# Altium PCB RF19_Sensor_CAN_Module.PcbDoc
Units mil, origin at the board's own origin, x right, y up, seen from the top; angles counter-clockwise.
Board outline 2220 x 660 mil, 4 copper layers (Top Layer, Ground Plane, Power Plane, Bottom Layer), stack 64.6 mil thick; 64 components, 48 nets, 194 pads, 72 vias.
Unrouted connection lines stored in the file: 9.
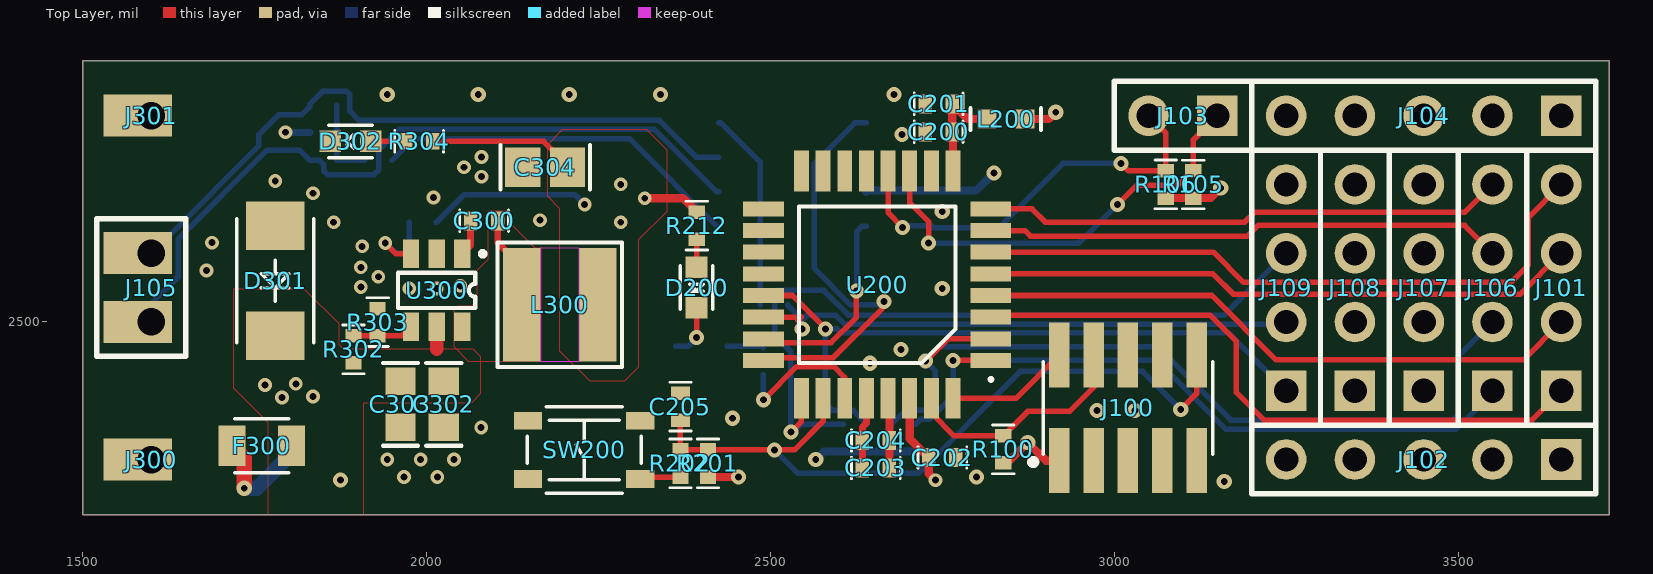
[diagram p0: Top Layer view]
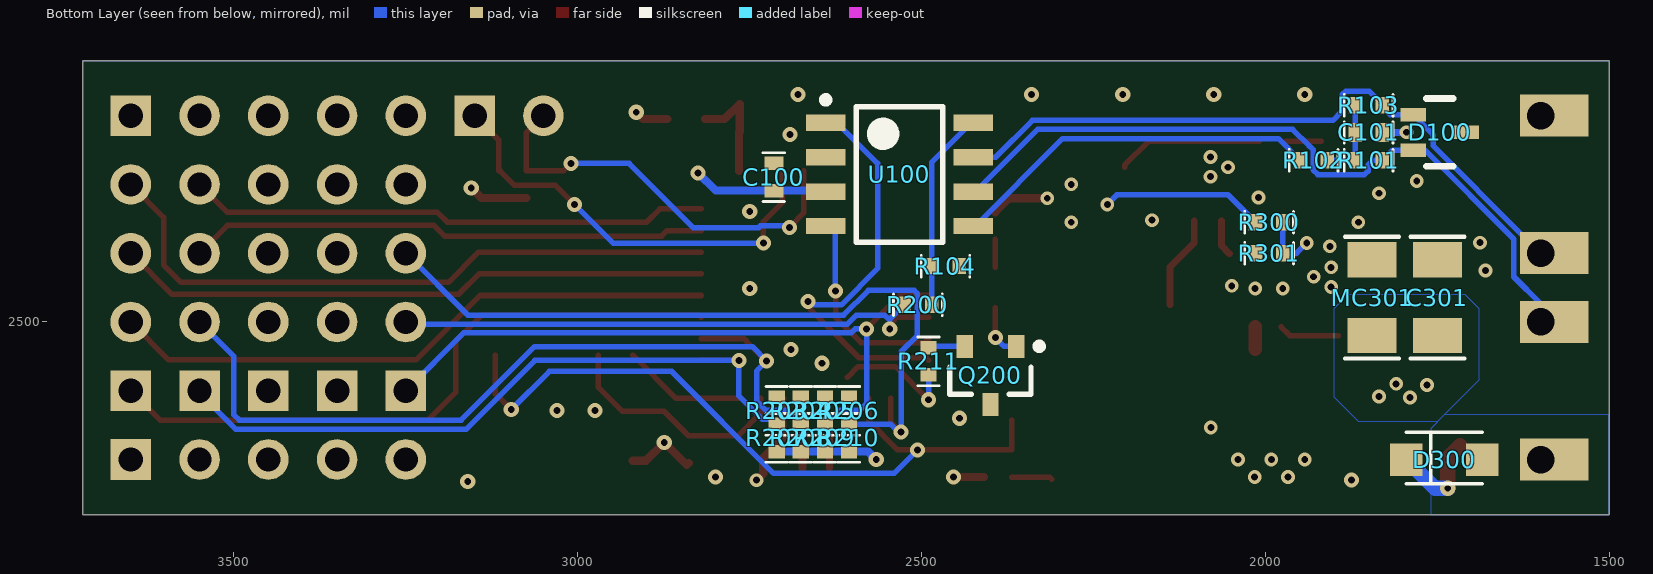
[diagram p1: Bottom Layer view, seen from below]
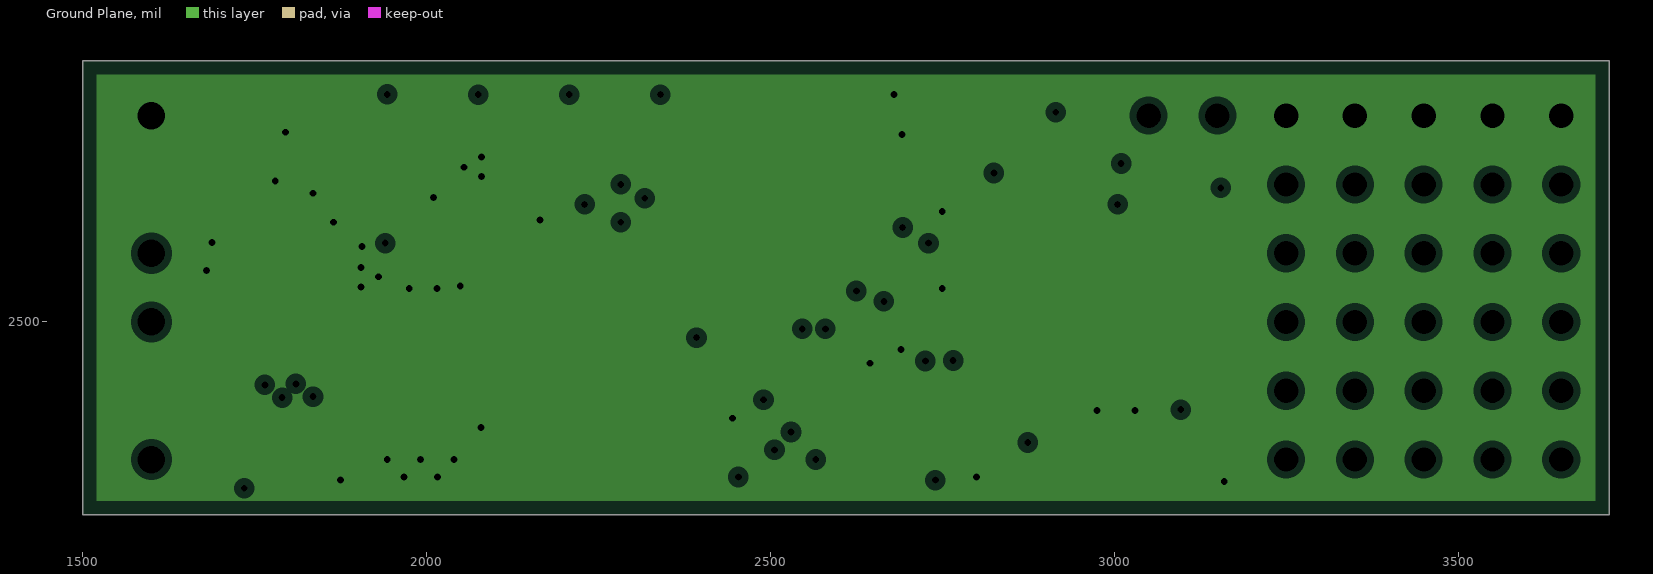
[diagram p2: Ground Plane, clearances drawn from the general rule]
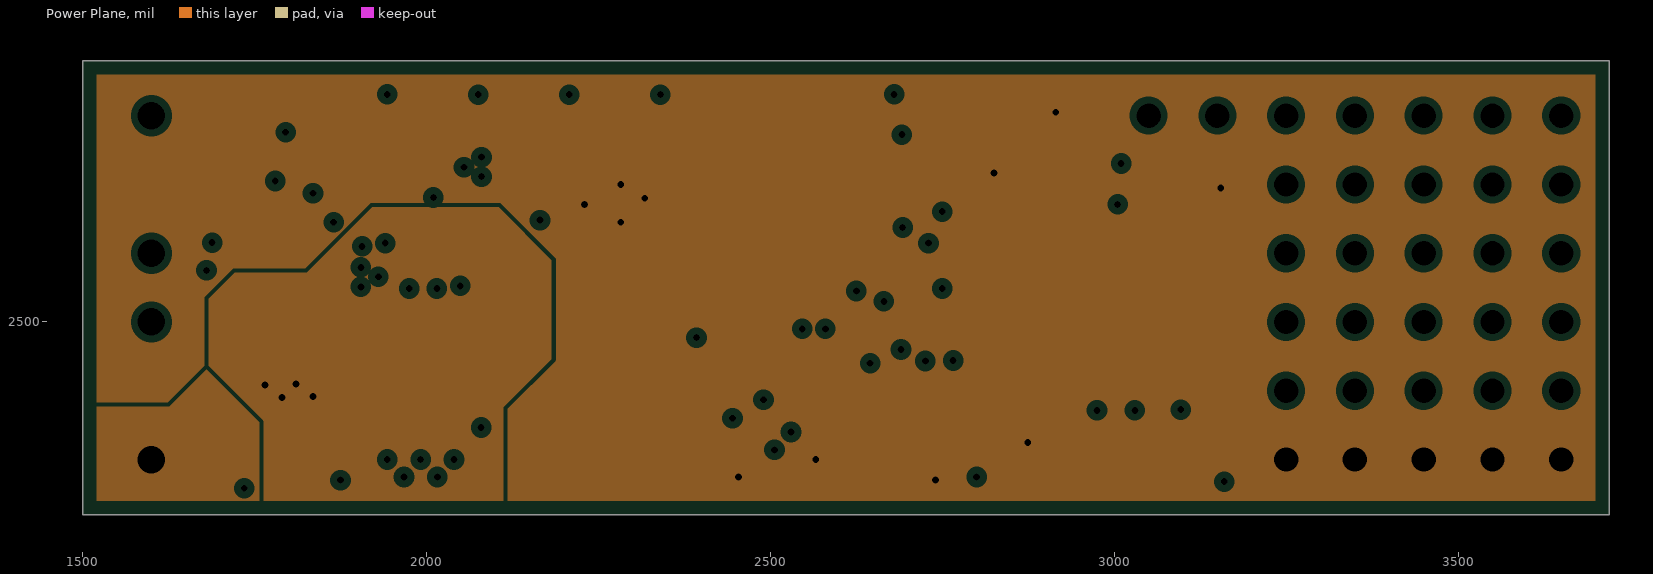
[diagram p3: Power Plane, clearances drawn from the general rule]
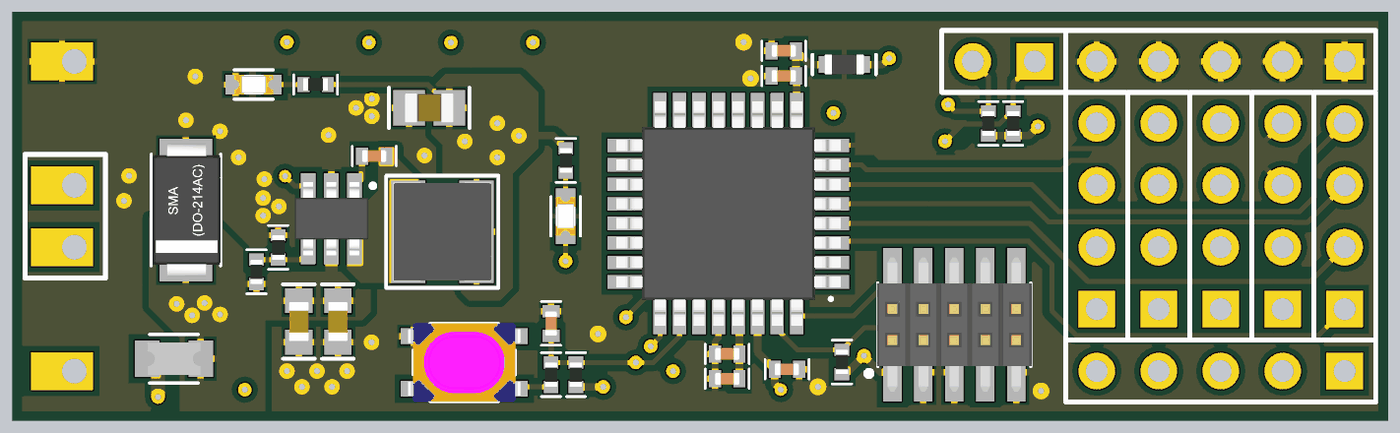
[diagram p4: 3D render of the assembled board from above, using the file's embedded part models]
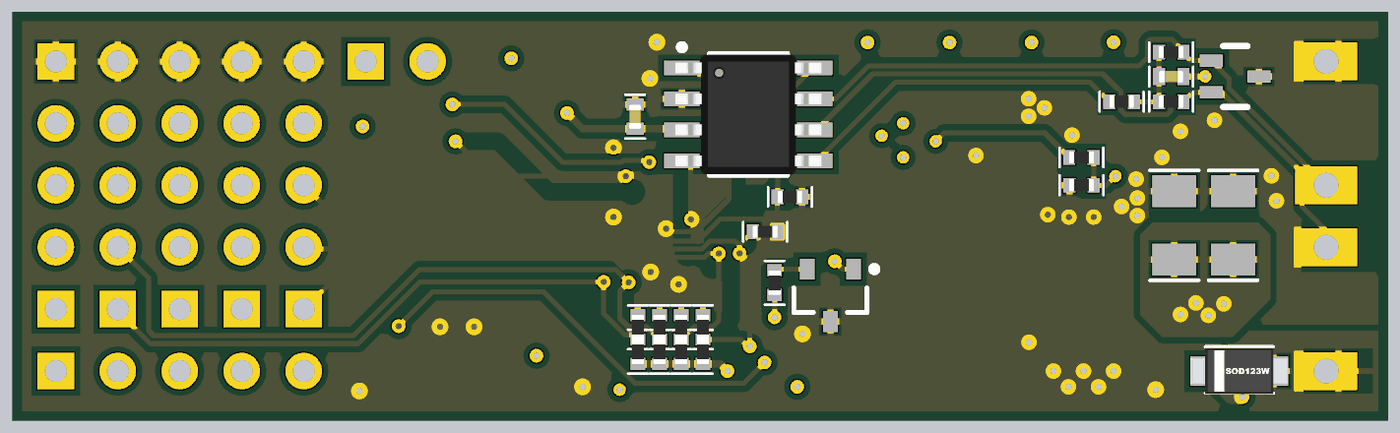
[diagram p5: 3D render of the assembled board from below, using the file's embedded part models]

## Layer stack, top to bottom
Top Solder: solder mask 1, Solder Resist, Dk 3.5
Top Layer: signal copper 1.4
Dielectric 1: prepreg 6.7, FR408, Dk 3.67
Ground Plane: plane copper 0.7, net GND
Dielectric 3: core 47, FR408, Dk 3.67
Power Plane: plane copper 0.7, net +5V
Dielectric 4: prepreg 6.7, FR408, Dk 3.67
Bottom Layer: signal copper 1.4
Bottom Solder: solder mask 1, Solder Resist, Dk 3.5

## Board outline
1500,2220 3720,2220 3720,2880 1500,2880

## Design rules (kind name [scope] priority, off if disabled: settings)
BoardOutlineClearance [All] p1: gap=15 ignorepadtopadclearanceinfootprint=FALSE
Clearance "Clearance Polygons" [InPolygon] p1: gap=10 ignorepadtopadclearanceinfootprint=FALSE except(0: Arc-Hole Track-Hole SMDPad-Hole THPad-Hole Via-Hole Fill-Hole Poly-Hole Region-Hole Text-Hole)
Clearance [All] p2: gap=5 ignorepadtopadclearanceinfootprint=FALSE except(0: Arc-Hole Track-Hole SMDPad-Hole THPad-Hole Via-Hole Fill-Hole Poly-Hole Region-Hole Text-Hole)
ComponentClearance "HM-TRP & UFL" [InComponent('X1') vs InComponent('U1')] p1: gap=0 collisioncheckmode=3 verticalgap=0 showdistances=FALSE
ComponentClearance [All] p2: gap=1 collisioncheckmode=3 verticalgap=1 showdistances=FALSE
DiffPairsRouting [All] p1: maxlimit=393.7 minlimit=5 mostfreqgap=8 toplayer_minwidth=5 toplayer_maxwidth=15 toplayer_prefwidth=8 bottomlayer_minwidth=5 bottomlayer_maxwidth=15 bottomlayer_prefwidth=8 maxuncoupledlength=500
HoleSize [All] p1: absolutevalues=TRUE maxlimit=265 minlimit=10 maxpercent=80.000 minpercent=20.000
HoleToHoleClearance [All] p1: gap=10 allowstackedmicrovias=FALSE
MinimumAnnularRing [All] p1: minimumring=4
MinimumSolderMaskSliver [All] p1: minsoldermaskwidth=0
PlaneClearance [All] p1: clearance=10
PlaneConnect [All] p1: planeconnectstyle=Relief reliefexpansion=4 reliefentries=4 reliefconductorwidth=6 reliefairgap=6
PolygonConnect "SW Polygon Connect" [InNet('SW')] p1: thpad.connectstyle=Relief thpad.reliefconductorwidth=10 thpad.reliefentries=4 thpad.polygonreliefangle="90 Angle" thpad.airgapwidth=10 smdpad.connectstyle=Direct smdpad.reliefconductorwidth=10 smdpad.reliefentries=4 smdpad.polygonreliefangle="90 Angle" smdpad.airgapwidth=10 via.connectstyle=Relief via.reliefconductorwidth=10 via.reliefentries=4 via.polygonreliefangle="45 Angle" via.airgapwidth=10
PolygonConnect "Via connect style" [isVia] p2: connectstyle=Direct reliefconductorwidth=10 reliefentries=4 polygonreliefangle="90 Angle" airgapwidth=10
PolygonConnect [All] p3: connectstyle=Relief reliefconductorwidth=10 reliefentries=4 polygonreliefangle="90 Angle" airgapwidth=6
RoomDefinition RF19_Sensor_CAN_Module_Power [InComponentClass('RF19_Sensor_CAN_Module_Power')] p1: confinementstyle=ConfineIn formatcopy=TRUE lockcomponents=FALSE outline 1500,2240 2380,2240 2380,2860 1500,2860
RoutingCorners [All] p1: cornerstyle=45-Degree minsetback=49.21 maxsetback=49.21
RoutingVias [All] p1: holewidth=12 width=22 viastyle="Through Hole" minholewidth=10 minwidth=18 maxholewidth=100 maxwidth=114
SilkToSilkClearance [All] p1: silktosilkclearance=0
SilkToSolderMaskClearance [IsPad] p1: minsilkscreentomaskgap=5 clearancetoexposedcopper=TRUE
SolderMaskExpansion [All] p1: expansion=2.5
Width GND [InNet('GND')] p1: maxlimit=30 minlimit=10 preferedwidth=20
Width Power [InNetClass('Power')] p2: maxlimit=40 minlimit=20 preferedwidth=30
Width 3V3 [InNetClass('3V3')] p3: maxlimit=30 minlimit=10 preferedwidth=20
Width [All] p4: maxlimit=400 minlimit=6 preferedwidth=8
20 further rules are at their usual default settings.

## Classes and differential pairs
component class RF19_Sensor_CAN_Module_Power: C300 C301 C302 C303 C304 D3 D300 D301 D302 F300 J300 J301 L300 MC301 R300 R301 R302 R303 R304 U300
component class RF19_Sensor_CAN_Module_MCU: C200 C201 C202 C203 C204 C205 D200 L200 Q200 R200 R201 R202 R203 R204 R205 R206 R207 R208 R209 R210 R211 R212 SW200 U200
component class RF19_Sensor_CAN_Module_Interfaces: C100 C101 D100 J100 J101 J102 J104 J105 J106 J107 J108 J109 R100 R101 R102 R103 R104 R105 R106 U100

## Components (designator, comment, footprint, x,y, rotation, side; value= is the part's Value field where it differs from the comment)
C100 "CAP CERAMIC" C0402 2715,2710.8 r90 bottom value=1.0uF
C101 "CERAMIC CAP" C0402 1850,2775.59 r180 bottom value=1.0uF
C200 "CAP CERAMIC" C0402 2744.83,2776.56 r180 top value=10uF
C201 "CAP CERAMIC" C0402 2744.83,2817.11 r180 top value=100nF
C202 "CAP CERAMIC" C0402 2750,2302.93 r0 top value=100nF
C203 "CAP CERAMIC" C0402 2653.49,2287.71 r180 top value=1uF
C204 "CAP CERAMIC" C0402 2653.49,2327.71 r180 top value=100nF
C205 "CAP CERAMIC" C0402 2369.28,2376.93 r90 top value=4.7nF
C300 "CERAMIC CAP" C0402 2083.86,2647.17 r180 top value=100nF
C301 "CERAMIC CAP" C1206 1750,2535.32 r90 bottom value=47uF
C302 "CERAMIC CAP" C0603 2025.18,2380.06 r270 top value=2.2uF
C303 "CERAMIC CAP" C0603 1962.19,2380.06 r270 top value=100nF
C304 "CERAMIC CAP" C0805 2172.52,2725 r180 top value=22uF
D100 "ESDCAN0x-2BWY" SOT323-3L 1746.61,2775.59 r270 bottom
D200 "BLUE" "0603 LED" 2392.68,2550 r270 top
D300 "Schottky" SOD-323W 1740.02,2300 r0 bottom
D301 "TVS" DO-214AC 1780,2560 r270 top value=15V
D302 "GREEN" "0603 LED" 1889.33,2762.66 r180 top
F300 "0.50A" "PTC 0805" 1760.55,2320.01 r0 top
J100 "" "5X2 HEADER" 3020,2375 r90 top value="PIN HEADER 2x5"
J101 "Header 4" HDR1X4 3650,2400 r90 top locked
J102 "Header 5" HDR1X5 3650,2300 r180 top locked
J103 "Header 2" HDR1X2#1 3150,2800 r180 top locked
J104 "Header 5" HDR1X5 3650,2800 r180 top locked
J105 "Header 2" HDR1X2#2 1600,2600 r270 top
J106 "Header 4" HDR1X4 3550,2400 r90 top locked
J107 "Header 4" HDR1X4 3450,2400 r90 top locked
J108 "Header 4" HDR1X4 3350,2400 r90 top locked
J109 "Header 4" HDR1X4 3250,2400 r90 top locked
J300 "BREAKOUT" "BREAKOOUT PAD" 1600,2300 r90 top
J301 "BREAKOUT" "BREAKOOUT PAD" 1600,2800 r90 top
L200 "" L0603_MURATA 2842.44,2795 r180 top value=BLM18PG471SN1
L300 "Inductor" SRN4018TA 2193.86,2525 r180 top value=47uH
MC301 "CERAMIC CAP" C1206 1845,2535.32 r90 bottom value=47uF
Q200 "QNPN" SOT-23B_L 2400,2422.31 r270 bottom
R100 "RESISTOR" R0402 2838.66,2314.68 r90 top value=1K
R101 "RESISTOR" R0402 1850,2735 r180 bottom value=60.4R
R102 "RESISTOR" R0402 1930,2735 r0 bottom value=300R
R103 "RESISTOR" R0402 1850,2815 r180 bottom value=60.4R
R104 "RESISTOR" R0402 2465.32,2581.22 r180 bottom value=10K
R105 "RESISTOR" R0402 3115,2699.92 r90 top value=4.7K
R106 "RESISTOR" R0402 3075,2699.93 r90 top value=4.7K
R200 "RESISTOR" R0402 2505.32,2525 r180 bottom value=1K
R201 "RESISTOR" R0402 2409.28,2294.25 r270 top value=100K
R202 "RESISTOR" R0402 2369.28,2294.26 r270 top value=39R
R203 "RESISTOR" R0402 2710.71,2370.68 r90 bottom value=10K
R204 "RESISTOR" R0402 2675.71,2370.68 r90 bottom value=10K
R205 "RESISTOR" R0402 2640.71,2370.68 r90 bottom value=10K
R206 "RESISTOR" R0402 2605.71,2370.68 r90 bottom value=10K
R207 "RESISTOR" R0402 2710.71,2331.31 r270 bottom value=10K
R208 "RESISTOR" R0402 2675.71,2331.31 r270 bottom value=10K
R209 "RESISTOR" R0402 2640.71,2331.31 r270 bottom value=10K
R210 "RESISTOR" R0402 2605.71,2331.31 r270 bottom value=10K
R211 "RESISTOR" R0402 2490,2442.63 r90 bottom value=1K
R212 "RESISTOR" R0402 2393.06,2640 r90 top value=150R
R300 "RESISTOR" R0402 1994.84,2645 r0 bottom value=88.7K
R301 "RESISTOR" R0402 1994.69,2600 r180 bottom value=22.1K
R302 "RESISTOR" R0402 1893.86,2460.32 r270 top value=22.1K
R303 "RESISTOR" R0402 1928.86,2499.69 r270 top value=3.3K
R304 "RESISTOR" R0402 1989.33,2762.66 r0 top value=150R
SW200 "*" "TACTILE GULL WING KMR7" 2229.28,2313.94 r180 top
U100 "MCP2561" SOIC127P600X175-8N 2532.28,2714.54 r180 bottom
U200 "ATSAMC21E18A" ATMEL_TQFP-32 2820.71,2444.02 r180 top
U300 "TPS560430" TI_SOP8_R-PDSO-G6 2052.12,2599.13 r270 top

## Footprints (in the part's own frame and the unit in brackets; to place one, negate y for a bottom-side part, rotate by r counter-clockwise, add the part's x,y. Pads: shape width x height; smd on the part's side, far side on the other; paste and mask are expansions set on the pad)
"5X2 HEADER" [mm] "10 Position 5x2 1.27mm Pitch Male Header"
  rect 2.4x0.76 smd: 1(-1.95,2.54) 2(1.95,2.54) 3(-1.95,1.27) 4(1.95,1.27) 5(-1.95,0) 6(1.95,0) 7(-1.95,-1.27) 8(1.95,-1.27) 9(-1.95,-2.54) 10(1.95,-2.54)
  silkscreen extent -2.1,-3.14 1.72,3.6, body extent -2.75,-3.17 2.75,3.18, height 4.67
"0603 LED" [mm] "LTST-C191KGKT SMD LED 0603 Footprint"
  rect 0.8x0.8 smd: A(-0.75,0) C(0.75,0)
  silkscreen extent -0.8,-0.6 0.8,0.6, body extent -0.8,-0.4 0.8,0.4, height 0.6
ATMEL_TQFP-32 [mm]
  rect 1.5x0.55 smd: 1(0,0) 2(0,-0.8) 3(0,-1.6) 4(0,-2.4) 5(0,-3.2) 6(0,-4) 7(0,-4.8) 8(0,-5.6) 17(8.4,-5.6) 18(8.4,-4.8) 19(8.4,-4) 20(8.4,-3.2) 21(8.4,-2.4) 22(8.4,-1.6) 23(8.4,-0.8) 24(8.4,0)
  rect 0.55x1.5 smd: 9(1.4,-7) 10(2.2,-7) 11(3,-7) 12(3.8,-7) 13(4.6,-7) 14(5.4,-7) 15(6.2,-7) 16(7,-7) 25(7,1.4) 26(6.2,1.4) 27(5.4,1.4) 28(4.6,1.4) 29(3.8,1.4) 30(3,1.4) 31(2.2,1.4) 32(1.4,1.4)
  silkscreen extent 0,-5.69 7.09,0.7, body extent -0.4,-7.4 8.8,1.8, height 1.2
"BREAKOOUT PAD" [mil] "Simple 40mil breakout pad"
  rect 61x100 / inner round 61 / far side rect 61x100 hole 40 copper offset 0,20: 1(0,0)
C0402 [mm] "Ceramic capacitor 0402 imperial"
  rect 0.5x0.7 smd: 1(-0.5,0) 2(0.5,0)
  silkscreen extent -0.9,-0.4 0.9,0.4, body extent -0.5,-0.25 0.5,0.25, height 0.49
C0603 [mil] "Yageo Class 2 X7R 0603 0.8mm Ceramic Capacitor"
  rect 40x44 smd: 1(-33.46,0) 2(33.46,0)
  silkscreen extent -60,-26 60,26, body extent -31,-16 32,16, height 35
C0805 [mm] "Yageo Class 2 X7R 0805 1.25mm Ceramic Capacitor"
  rect 1.3x1.45 smd: 1(-0.825,0) 2(0.825,0)
  silkscreen extent -1.65,-0.82 1.65,0.82, body extent -1,-0.6 1,0.6, height 1.2
C1206 [mm] "1206 Package Size Ceramic Capacitor"
  rect 1.3x1.8 smd: 1(-1.4,0) 2(1.4,0)
  silkscreen extent -2.25,-1 2.25,1, body extent -1.7,-0.9 1.7,0.9, height 1.8
DO-214AC [mil] "DO-214AC High Profile Diode"
  rect 70x85 smd: A(-80,0) C(80,0)
  silkscreen extent -90,-56 90,56, body extent -108,-54 108,56, height 102
HDR1X2#1 [mm] "Connector; Header; 2 Position"
  rect 1.5x1.5 hole 0.9: 1(0,0)
  round 1.5 hole 0.9: 2(2.54,0)
  silkscreen extent -1.27,-1.27 3.81,1.27
HDR1X2#2 [mm] "Connector; Header; 2 Position"
  rect 1.549x2.54 / inner round 1.549 / far side rect 1.549x2.54 hole 1.016 copper offset 0,-0.508: 1(0,0) 2(2.54,0)
  silkscreen extent -1.27,-2.02 3.81,1.27
HDR1X4 [mm] "Connector; Header; 4 Position"
  rect 1.5x1.5 hole 0.9: 1(0,0)
  round 1.5 hole 0.9: 2(2.54,0) 3(5.08,0) 4(7.62,0)
  silkscreen extent -1.27,-1.27 8.89,1.27
HDR1X5 [mm] "Connector; Header; 5 Position"
  rect 1.5x1.5 hole 0.9: 1(0,0)
  round 1.5 hole 0.9: 2(2.54,0) 3(5.08,0) 4(7.62,0) 5(10.16,0)
  silkscreen extent -1.27,-1.27 11.43,1.27
L0603_MURATA [mm] "Chip inductor/bead from muRata"
  rect 0.7x0.7 smd: 1(-0.7,0) 2(0.7,0)
  silkscreen extent -1.3,-0.4 1.3,0.4, body extent -0.8,-0.4 0.8,0.4, height 0.8
"PTC 0805" [mm]
  rect 1x1.5 smd: 1(-1.1,0) 2(1.1,0)
  silkscreen extent -1,-1 1,1, body extent -1.08,-0.68 1.08,0.68, height 1
R0402 [mm]
  rect 0.5x0.6 smd: 1(-0.5,0) 2(0.5,0)
  silkscreen extent -0.9,-0.4 0.9,0.4, body extent -0.5,-0.25 0.5,0.25, height 0.35
SOD-323W [mm] "Diode SOD-323W Package"
  rect 1.2x1.2 smd: A(-1.4,0) C(1.4,0)
  silkscreen extent -1.4,-1 1.4,0.9, body extent -2,-0.95 2,0.95, height 1.1
SOIC127P600X175-8N [mm] "SOIC, 8-Leads, Body 4.90x3.90mm, Pitch 1.27mm, IPC Medium Density"
  rect 1.45x0.6 smd: 1(-2.725,1.905) 2(-2.725,0.635) 3(-2.725,-0.635) 4(-2.725,-1.905) 5(2.725,-1.905) 6(2.725,-0.635) 7(2.725,0.635) 8(2.725,1.905)
  silkscreen extent -2.85,-2.5 1.6,2.88, body extent -3,-2.45 3,2.45, height 1.7
SOT323-3L [mm] "3-pin SOT package"
  rect 0.5x0.95 smd: 1(-0.65,-0.975) 2(0.65,-0.975) 3(0,0.975)
  silkscreen extent -1.25,-0.5 1.25,0.5
SOT-23B_L [mm] "SOT23, 3-Leads, Body 2.9x1.3mm, Pitch 0.95mm, Lead Span 2.4mm, IPC High Density"
  rect 0.85x0.6 smd: 1(-1.075,0.95) 2(-1.075,-0.95) 3(1.075,0)
  silkscreen extent -1.2,-1.5 0.7,1.92, body extent -0.7,-1.5 0.7,1.5, height 1.14
SRN4018TA [mm]
  rect 1.4x4.2 smd: 1(1.4,0) 2(-1.4,0)
  Top Layer keep-out region: -0.7,2.1 0.7,2.1 0.7,-2.1 -0.7,-2.1
  silkscreen extent -2.3,-2.3 2.3,2.3, body extent -2.01,-2.01 2.01,2.01, height 1.2
"TACTILE GULL WING KMR7" [mm] "PTS810 Series Tactile Switch Footprint"
  rect 1.05x0.65 smd: 1(-2.075,1.075) 2(2.075,1.075) 3(-2.075,-1.075) 4(2.075,-1.075)
  silkscreen extent -2.1,-1.6 2.1,1.6, body extent -2.3,-1.6 2.3,1.6, height 2.5
TI_SOP8_R-PDSO-G6 [mm]
  rect 1.05x0.6 smd: 1(0,0) 2(0,-0.95) 3(0,-1.9) 4(2.7,-1.9) 5(2.7,-0.95) 6(2.7,0)
  silkscreen extent -0.07,-2.38 2,0.82, body extent -0.15,-2.45 2.85,0.55, height 1.5

## Part data
C100 C200 C201 C202 C203 C204 C205 C300 C302 C303 C304: "Ceramic Capacitor"
C101: "Ceramic Capacitor", Supplier Part Number 1=311-1802-1-ND, Supplier 1=Digi-Key
C301 MC301: library part "CAP CERAMIC", "Ceramic capacitor"
D100: "Dual-line Transil TVS diodes for CAN bus"
D200 D302: library part LED, "Standard LED, 5mm or 0603 SMD"
D300: library part "DIODE SCHOTTKY", "High speed Schottky Diode"
D301: library part "DIODE TVS", "TVS protection diode", Power=1W
F300: library part PTC, "PTC RESETTBLE 0.50A 9V 0805"
J100: library part A08-0385, "2x5 pin header, 1.27mm pitch, THM", Manufacturer=Garry, MPN=176-2-010-0-T-XS0-0730, AN=A08-0385, Height=7,30000019073486, PartGroup="Mechanical devices,Connectors,Pin headers"
J101 J106 J107 J108 J109: "Header, 4-Pin", LatestRevisionDate=17-Jul-2002, LatestRevisionNote="Re-released for DXP Platform.", Publisher="Altium Limited"
J102 J104: "Header, 5-Pin", LatestRevisionDate=17-Jul-2002, LatestRevisionNote="Re-released for DXP Platform.", Publisher="Altium Limited"
J103 J105: "Header, 2-Pin", LatestRevisionDate=17-Jul-2002, LatestRevisionNote="Re-released for DXP Platform.", Publisher="Altium Limited"
J300 J301: "Breakout pad for later extension"
L200: library part A03-0035, "SMD RF inductor 0603. Z=470Ohm (@100MHz), Max R(dc)=0.65Ohm, Max current=1A", Manufacturer=Murata, MPN=BLM18PG471SN1, TemperatureRange="-55°C to +125°C", Tolerance=±25%, AN=A03-0035, Height=0,800000011920929, PartGroup=Inductors,EMI
Q200: "NPN Bipolar Transistor", LatestRevisionDate=29-May-2009, LatestRevisionNote="IPC-7351 Footprint Added.", PackageDescription="3-Pin SOT-23 Package 0.95 mm Pitch, 2.4 mm Lead Span", PackageReference=SOT-23B, PackageVersion=Aug-1999, Published=8-Jun-2000, Publisher="Altium Limited"
R100 R101 R102 R103 R104 R105 R106 R200 R201 R202 R203 R204 R205 R206 R207 R208 R209 R210 R211 R212 R300 R301 R302 R303 R304: "Resistor"
SW200: library part "SWITCH TACTILE ALT", "Tactile Switch SPST-NO Top Actuated Surface Mount", Supplier Part Number 1=CKN10689CT-ND, Supplier 1=Digi-Key
U100: "High Speed CAN Transceiver"
U200: "Atmel SAM ARM Cortex-M0+ 32-bit MCU"
L300: Code_IEC=1005, Code_JEITA=0402, LatestRevisionDate=29-May-2009, LatestRevisionNote="IPC-7351 Footprint Added.", PackageDescription="Chip Inductor", PackageReference=0402-A, Published=8-Jun-2000, Publisher="Altium Limited"

## Via types
v1: diameter 22, hole 10, Top Layer to Bottom Layer, 38 vias
v2: diameter 20, hole 10, Top Layer to Bottom Layer, 34 vias

## Nets (pads, with @x,y where several pads share a name; then routed paths per layer and width w, separated by ;. In a path a pad name is that pad's centre, name@x,y a point inside that pad or via, vN(x,y) a via of type N, cw(c..) or ccw(c..) an arc to the next point about the centre after c; other vN are vias at no path point)
+5V: C100.1 C202.1 C304.1 J100.1 J102.1 J102.2 J102.3 J102.4 J102.5 L200.1 L300.2 R100.1 R105.1 R106.1 R201.2 R207.2 R208.2 R209.2 R210.2 R212.2 R300.2 R304.2 U100.3 U200.30 | length 1302.4
  Top Layer w8: R304.2 2170.29,2762.66 2205,2727.95 C304.1
  Top Layer w12: v2(2317.28,2680) 2372.75,2680 R212.2 ; R201.2 v1(2453.42,2274.57) ; U200.30 2702.6,2330.64 C202.1 2730.31,2279.69 v2(2740,2270) ; R100.1 2841.56,2292.1 v1(2874.29,2324.84) 2900.9,2298.23 J100.1 ; L200.1 2905,2795 v1(2915,2805) ; R106.1 R105.1 3140.24,2680.24 v1(3155,2695)
  Bottom Layer w8: R300.2 2054.53,2685 2215.95,2685 v2(2230,2670.95)
  Bottom Layer w12: v1(2566.08,2300) 2577.71,2311.63 R210.2 R209.2 R208.2 R207.2 ; U100.3 2641.14,2691.12 C100.1 2799.39,2691.12 v1(2825,2716.73)
  other v2: 2282.53,2645 2282.53,2700.16
+5V_VDDANA: C200.1 C201.1 L200.2 U200.9 | length 157.5
  Top Layer w12: U200.9 2765.59,2775.48 C200.1 C201.1 2786.62,2795 L200.2
+VIN: D300.A J300.1
+VIN_F: C301.1 C302.1 C303.1 D301.C F300.2 MC301.1 R302.2 U300.5 | length 32
  Top Layer w20: 2014.72,2460.79 U300.5
  other v2: 1790,2390 1835,2391.48 1765,2408.52 1810,2410
CAN_EN#: R104.1 R200.2 U100.8 | length 291.5
  Bottom Layer w8: U100.8 2428.08,2789.54 2485,2732.62 R104.1 2485.63,2580.59 R200.2
CAN_RX: U100.1 U200.24 | length 593.4
  Top Layer w8: U200.24 2493.98,2448 2591.38,2448 2662.32,2518.94 2662.32,2527.32 v1(2665,2530)
  Bottom Layer w8: U100.1 2622.83,2789.54 2563.9,2730.6 2563.9,2577.82 2616.72,2525 2656.21,2525 2661.21,2530 v1(2665,2530)
CAN_TX: U100.4 U200.23 | length 294.9
  Top Layer w8: U200.23 2495.51,2470 2588.28,2470 2625,2506.72 v1(2625,2545)
  Bottom Layer w8: v1(2625,2545) 2625.71,2545.71 2625.71,2631.73 2633.52,2639.54 U100.4
CANH: D100.1 J105.1 R103.2 U100.7 | length 994.3
  Bottom Layer w8: J105.1 1610,2600 1626,2616 1626,2626 1756.3,2756.3 1756.3,2772.48 D100.1 1818.46,2801.18 1830.31,2813.03 R103.2 1830.31,2816.97 1849.16,2835.81 1883.26,2835.81 1888.53,2830.54 1888.53,2806.47 1901.93,2793.07 2338.93,2793.07 2392.46,2739.54 U100.7
CANL: D100.2 J105.2 R101.2 U100.6 | length 1078.4
  Bottom Layer w8: J105.2 1600,2526.77 1639,2565.77 1639,2620.62 1768.38,2750 D100.2 1815.31,2750 R101.2 1844.16,2735 1850.84,2728.31 1850.84,2719.46 1856.11,2714.19 1923.89,2714.19 1930.84,2721.15 1930.84,2750.54 1936.11,2755.81 1936.26,2755.81 1960.51,2780.07 2331.39,2780.07 2421.92,2689.54 U100.6
GND: C100.2 C101.2 C200.2 C201.2 C202.2 C203.2 C204.2 C205.2 C301.2 C302.2 C303.2 C304.2 D100.3 D301.A D302.C J100.3 J100.5 J100.9 J104.1 J104.2 J104.3 J104.4 J104.5 J301.1 MC301.2 Q200.3 R104.2 R203.2 R204.2 R205.2 R206.2 R301.1 R303.1 SW200.4 U100.2 U200.10 U200.28 U300.2 | length 138.9
  Top Layer w10: C203.2 C204.2 2633.8,2347.49 2639.61,2353.29 U200.28
  Bottom Layer w10: v2(1795.13,2775.83) 1795.25,2775.71 1830.2,2775.71 C101.2
  other v1: 3160,2267.93 1875,2270 2800,2274.57 2445,2360 2975,2371.52 3030,2371.52 2645,2440 2690,2460 2750,2548.65 2750,2660.55 2691.22,2772.48 2680,2831.03
  other v2: 1967.21,2274.57 2015.74,2274.57 1942.95,2300 1991.48,2300 2040,2300 2079.47,2346.59 1975,2548.65 2015,2548.65 1904.53,2551.01 2049.07,2552.55 1930,2565.77 1680,2575 1904.53,2579.42 1906.47,2610 1688.19,2615.32 1865,2645 2165,2648.06 2010,2681 1835,2687.17 1780,2705 2080,2711.35 2054.53,2725 2080,2739.76
NetC101_1: C101.1 R101.1 R102.1 R103.1 | length 120.6
  Bottom Layer w8: R103.1 R101.1 R102.1
NetC203_1: C203.1 C204.1 U200.29 | length 102
  Top Layer w12: U200.29 2673.17,2386.83 C204.1 C203.1
NetC300_2: C300.2 U300.1 | length 53
  Top Layer w10: U300.1 2064.17,2611.18 C300.2
NetD200_A: D200.A R212.1 | length 40.9
  Top Layer w8: D200.A 2393.06,2579.91 R212.1
NetD200_C: D200.C Q200.1 | length 78.5
  Top Layer w8: v1(2392.68,2477.32) D200.C
  Bottom Layer w8: Q200.1 2379.99,2464.63 v1(2392.68,2477.32)
NetD300_C: D300.C F300.1 | length 146.6
  Top Layer w22: F300.1 1735,2302.26 v1(1735,2258.18)
  Bottom Layer w22: v1(1735,2258.18) 1753.32,2258.18 D300.C
NetD302_A: D302.A R304.1 | length 50.8
  Top Layer w8: D302.A R304.1
NetJ100_2: J100.2 U200.32 | length 180.5
  Top Layer w8: U200.32 2857.13,2388.9 J100.2
NetJ100_4: J100.4 R100.2 U200.31 | length 347.2
  Top Layer w8: U200.31 2734.09,2367.31 2767.04,2334.37 R100.2 2874.29,2370 2935,2370 2970,2405 J100.4
NetQ200_2: Q200.2 R211.2 | length 53.6
  Bottom Layer w8: Q200.2 2487.68,2464.63 R211.2
NetR102_2: R102.2 U100.5 | length 542.3
  Bottom Layer w8: R102.2 1981.25,2766.57 2294.89,2766.57 2423.46,2638 U100.5
NetR202_2: R202.2 SW200.1 | length 59.5
  Top Layer w8: SW200.1 2313.94,2274.58 R202.2
NetR300_1: R300.1 R301.2 U300.3 | length 130
  Top Layer w8: v2(1940,2614.74) 1955.6,2599.13 U300.3
  Bottom Layer w8: v2(1940,2614.74) 1954.74,2600 R301.2 1975.16,2600.16 R300.1
NetR302_1: R302.1 R303.2 U300.4 | length 88.8
  Top Layer w8: R302.1 R303.2 1964.49,2480 U300.4
PA00: J106.1 R203.1 R207.1 U200.1 | length 1029.2
  Top Layer w8: v1(2765.78,2444.02) U200.1
  Bottom Layer w8: R207.1 2718.24,2358.52 2731.63,2358.52 2765.78,2392.67 v1(2765.78,2444.02) 3062.37,2444.02 3162.13,2344.26 3497.64,2344.26 3550,2396.62 J106.1
PA01: J106.2 R204.1 R208.1 U200.2 | length 1237.9
  Top Layer w8: v1(2725.48,2443.24) 2726.52,2443.24 2755,2471.72 2755,2472.76 2757.75,2475.51 U200.2
  Bottom Layer w8: R208.1 2696.24,2371.52 2726.25,2371.52 2740,2385.28 2740,2428.72 v1(2725.48,2443.24) 2746.26,2464.02 3062.78,2464.02 3169.54,2357.26 3492.26,2357.26 3500,2365 3500,2450 J106.2
PA02/AIN0: J101.1 U200.3 | length 955
  Top Layer w8: U200.3 2823.72,2510.02 3139.52,2510.02 3177.72,2471.82 3177.72,2397.67 3218.15,2357.24 3607.24,2357.24 J101.1
PA03/AIN1: J101.2 U200.4 | length 890.8
  Top Layer w8: U200.4 3141.94,2538.5 3235.45,2445 3595,2445 J101.2
PA04/AIN4: J101.3 U200.5 | length 866.6
  Top Layer w8: U200.5 3143.65,2570 3173.12,2540.53 3566.79,2540.53 3567.31,2540 3590,2540 J101.3
PA05/AIN5: J101.4 U200.6 | length 947.1
  Top Layer w8: U200.6 3144.3,2601.5 3188.27,2557.53 3576.76,2557.53 3602.13,2582.9 3602.13,2652.13 J101.4
PA06: J106.3 U200.7 | length 755.8
  Top Layer w8: U200.7 2870,2632.99 2877.99,2625 3193.64,2625 3209.17,2640.53 3509.47,2640.53 J106.3
PA07: J106.4 U200.8 | length 760.1
  Top Layer w8: U200.8 2880.49,2664.49 2899.98,2645 3189.6,2645 3204.07,2659.47 3509.47,2659.47 J106.4
PA08/SDA: J103.1 R105.2 U200.11 | length 639.5
  Top Layer w8: U200.11 2702.6,2673.42 2730,2646.02 v1(2730,2614.74) ; v1(3005,2670.95) 3033.14,2699.09 3092.51,2699.09 3113.03,2719.61 R105.2 3115,2765 J103.1
  Bottom Layer w8: v1(2730,2614.74) 2948.79,2614.74 v1(3005,2670.95)
PA09/SCL: J103.2 R106.2 U200.12 | length 609.7
  Top Layer w8: U200.12 2671.1,2658.9 2692.36,2637.64 v1(2692.36,2637.36) ; v1(3010,2730.49) 3020.87,2719.62 R106.2 3075,2775 J103.2
  Bottom Layer w8: v1(2692.36,2637.36) 2695,2640 2734.53,2640 2737.17,2637.36 2832.27,2637.36 2925.39,2730.49 v1(3010,2730.49)
PA10: J107.1 U200.13
PA11: J107.2 U200.14
PA14: J107.3 U200.15
PA15: J107.4 U200.16
PA16: J108.1 U200.17
PA17: J108.2 U200.18
PA18: J108.3 U200.19
PA19: J108.4 U200.20
PA22: J109.1 R205.1 R209.1 U200.21 | length 999.6
  Top Layer w8: U200.21 2532.04,2538.5 2580,2490.55 v1(2580,2490)
  Bottom Layer w8: v1(2580,2490) 2580,2381.69 2590.17,2371.52 2620.18,2371.52 R209.1 R209.1@2638.74,2351 ; v1@2583,2487 2586,2490 2596.56,2490 2602.56,2484 3166,2484 J109.1
PA23: J109.2 R200.1 U200.22 | length 834.7
  Top Layer w8: U200.22 2544.51,2507.01 ; v1(2546.47,2490) 2546.47,2496.03 2540,2502.5 2544.51,2507.01 ; 2544.51,2507.01 2544.83,2507.33 2545.15,2507.01 2544.51,2507.01
  Bottom Layer w8: R200.1 2546.47,2503.53 2546.47,2502.68 ; v1(2546.47,2490) 2546.47,2502.68 ; J109.2 3247,2497 2607.95,2497 2594.95,2510 2553.79,2510 2546.47,2502.68
PA27: J109.3 R206.1 R210.1 U200.25 | length 1144.3
  Top Layer w8: v1(2530,2340) 2545.12,2355.12 U200.25
  Bottom Layer w8: R210.1 2544.78,2351 2533.79,2340 v1(2530,2340) 2530,2456.69 2506.16,2480.54 2506.16,2541.16 2510.81,2545.81 2577.52,2545.81 2613.33,2510 3160,2510 J109.3
PA28: J109.4 R211.1 U200.27 | length 180.7
  Top Layer w8: v1@2490,2386.86 2538.14,2435 2592.51,2435 2608.11,2419.4
  Bottom Layer w8: v1(2490,2386.83) R211.1
RESET#: C205.1 J100.10 R201.1 R202.1 U200.26 | length 1079.1
  Top Layer w8: C205.1 R202.1 R201.1 v1(2506.06,2313.94) 2534.91,2313.94 2576.61,2355.64 U200.26 ; v1(3096.78,2372.59) 3120,2395.81 J100.10
  Bottom Layer w8: v1(2506.06,2313.94) 2540,2280 2715.3,2280 2863.4,2428.1 3041.28,2428.1 v1(3096.78,2372.59)
SW: C300.1 L300.1 U300.6 | length 136.7
  Top Layer w10: C300.1 2103.54,2615.32 2138.74,2580.12 L300.1
pads on no net: J100.6 J100.7 J100.8 SW200.2 SW200.3
copper on no net:
  other v1: 1942.95,2831.03 2075.3,2830.54 2207.65,2830.54 2340,2830.54

## Polygon pours and split planes (outlines as drawn)
GND on Top Layer "NONET_L01_P029" (solid, shelved, pour order 29): 1500,2220 3720,2220 3720,2880 1500,2880
+VIN_F on Top Layer "NONET_L01_P028" (solid, shelved, pour order 28): 2067.51,2460.79 2078.3,2450 2078.3,2395.45 2064.76,2381.9 1907.87,2381.9 1907.87,2220 1770,2220 1770,2353.28 1720,2403.28 1720,2548.65 1786.34,2548.65 1821.35,2548.65 1872.05,2497.95 1872.05,2467.95 1879.21,2460.79
SW on Top Layer "NONET_L01_P025" (solid, shelved, pour order 25): 2120.92,2661.4 2120.92,2644.08 2157.32,2607.68 2166.3,2607.68 2166.3,2442.32 2061.69,2442.32 2040,2464.02 2040,2517.15 2046.15,2523.3 2065.81,2523.3 2073.52,2531.01 2073.94,2531.42 2073.94,2575 2090,2591.06 2090,2661.4
+5V on Top Layer "NONET_L01_P027" (solid, shelved, pour order 27): 2193.86,2665 2176.21,2682.65 2176.21,2758.02 2198.26,2780.07 2319.48,2780.07 2349.09,2750.45 2349.09,2660.55 2307.86,2619.31 2307.86,2434.13 2287.25,2413.52 2237.81,2413.52 2193.86,2457.48
GND on Bottom Layer "NONET_L04_P032" (solid, remove dead copper, shelved, pour order 32): 1500,2880 1500,2220 3720,2220 3720,2880
+VIN on Bottom Layer "NONET_L04_P031" (solid, shelved, pour order 31): 1500.88,2365 1740,2365 1760,2345 1760,2220 1500.88,2220
+VIN_F on Bottom Layer "NONET_L04_P030" (solid, shelved, pour order 30): 1750,2355 1864.69,2355 1900,2390.31 1900,2520.27 1880,2540.27 1710.27,2540.27 1690,2520 1690,2415
GND on Ground Plane (split plane): 3699.9,2240.1 1520.1,2240.1 1520.1,2859.9 3699.9,2859.9
+VIN on Power Plane (split plane): 1756.94,2353.73 1756.94,2240.1 1520.1,2240.1 1520.1,2376.94 1625,2376.94 1626.17,2377.17 1627.16,2377.84 1680,2430.67
+VIN_F on Power Plane (split plane): 2181.94,2589.68 2181.94,2446.27 2112.84,2377.16 2112.17,2376.17 2111.94,2375 2111.94,2240.1 1763.06,2240.1 1763.06,2355 1762.83,2356.17 1762.16,2357.16 1683.06,2436.27 1683.06,2533.73 1721.27,2571.94 1825,2571.94 1826.17,2572.17 1827.16,2572.84 1921.27,2666.94 2104.68,2666.94
+5V on Power Plane (split plane): 3699.9,2240.1 2118.06,2240.1 2118.06,2373.73 2187.16,2442.84 2187.83,2443.83 2188.06,2445 2188.06,2590.95 2187.83,2592.12 2187.16,2593.11 2108.11,2672.16 2107.12,2672.83 2105.95,2673.06 1920,2673.06 1918.83,2672.83 1917.84,2672.16 1823.73,2578.06 1720,2578.06 1718.83,2577.83 1717.84,2577.16 1677.84,2537.16 1677.17,2536.17 1676.94,2535 1676.94,2436.27 1623.73,2383.06 1520.1,2383.06 1520.1,2859.9 3699.9,2859.9

## Other copper
Power Plane (plane layer: these items are gaps in the copper):
  lines w6: 1500,2380 1625,2380 1680,2435 ; 1760,2220 1760,2355 1680,2435 ; 2115,2220 2115,2375 2185,2445 2185,2590.95 2105.95,2670 1920,2670 1825,2575 1720,2575 1680,2535 1680,2435

## Silkscreen, mask and mechanical layers (free items; w line width, h text height)
Mechanical 1:
  region: 1705.4,2726.96 1707.36,2724.99 2355,2724.99 2355,2315.54 1705.4,2315.54
  lines w5: 1500,2220 1500,2880 3720,2880 3720,2220 1500,2220
  text "Mechanical region is size of buck LDO replacement module used in past years. goal is to make solution smaller than this" at 1825.24,3020 h60

## Dimensions
1500,2220 to 3720,2220 on Mechanical 1
1500,2220 to 1500,2880 on Mechanical 1